# Allegro board GALVO_IF.brd
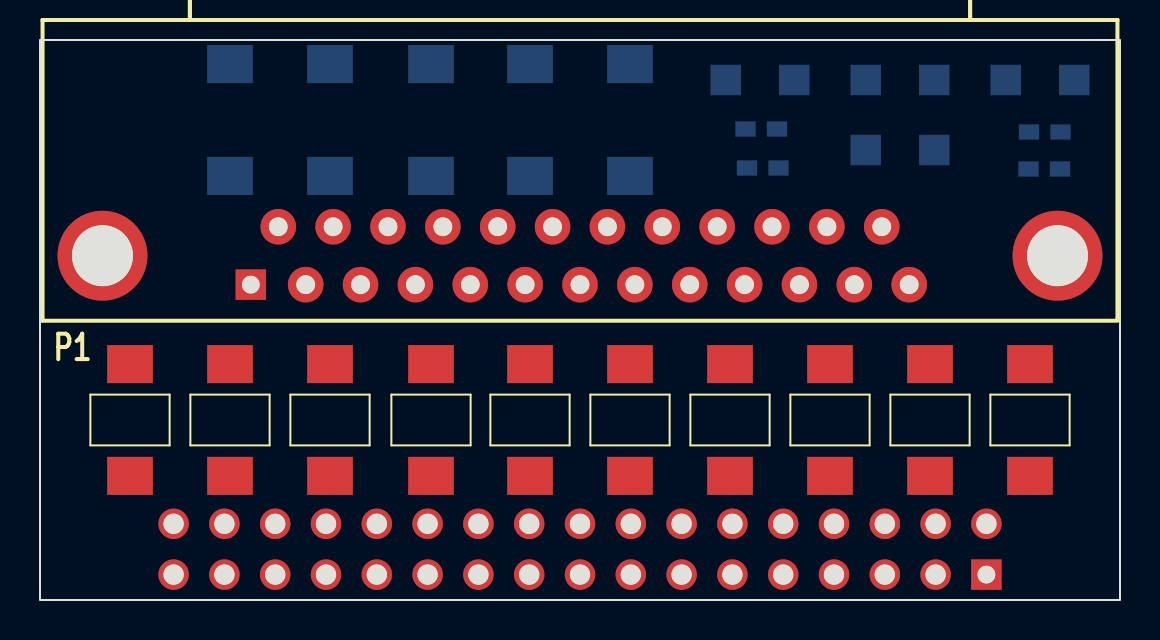
[diagram p0: board, top side]
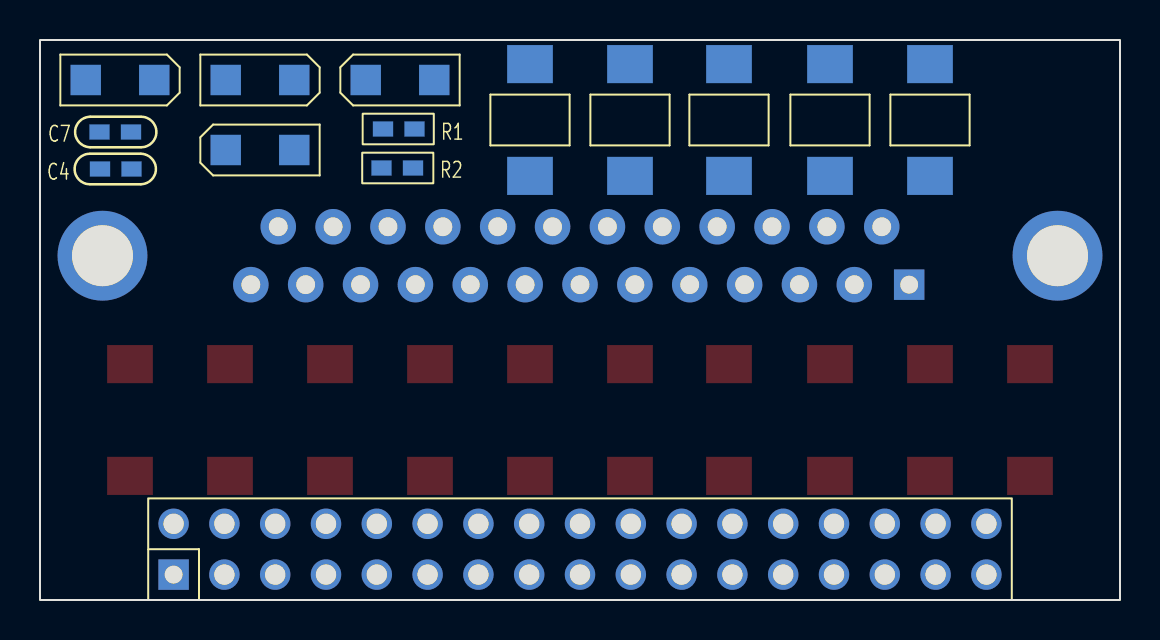
[diagram p1: board, bottom side, seen from below]

Outline 54 x 28 mm; copper layers: TOP, BOTTOM. Coordinates in mm from the lower left corner of the outline.
Outline path: rectangle 0,0 54,28

## Placement (name value [footprint] x y rotation side)
C1  102/2KV  [1206]  36 26 180 bottom
C3  22uF  [1206]  43 26 0 bottom
C4  0.1uF  [0603C]  51 21.55 180 bottom
C6  22uF  [1206]  50 26 0 bottom
C7  0.1uF  [0603C]  49.45 23.4 0 bottom
D1  SMBJ12CA  [DO-214AA]  9.5 24 270 bottom
D2  SMBJ12CA  [DO-214AA]  14.5 24 270 bottom
D3  SMBJ6.0CA  [DO-214AA]  9.5 9 270 top
D4  SMBJ6.0CA  [DO-214AA]  19.55 9 270 top
D5  SMBJ6.0CA  [DO-214AA]  4.5 9 270 top
D6  SMBJ6.0CA  [DO-214AA]  14.5 9 270 top
D7  SMBJ12CA  [DO-214AA]  19.55 24 270 bottom
D8  SMBJ12CA  [DO-214AA]  24.5 24 270 bottom
D9  SMBJ6.0CA  [DO-214AA]  29.5 9 270 top
D10  SMBJ6.0CA  [DO-214AA]  39.5 9 270 top
D11  SMBJ6.0CA  [DO-214AA]  24.5 9 270 top
D12  SMBJ6.0CA  [DO-214AA]  34.5 9 270 top
D13  SMBJ12CA  [DO-214AA]  29.5 24 270 bottom
D14  SMBJ6.0CA  [DO-214AA]  49.5 9 270 top
D15  SMBJ6.0CA  [DO-214AA]  44.5 9 270 top
J1  HEADER 17X2  [IDC34]  23.19 2.54 90 bottom
L1  FB  [1206]  43 22.5 180 bottom
P1  CONNECTOR DB25  [DB25HF]  27 29 180 top
R1  1M  [0603R]  36.85 23.55 180 bottom
R2  10  [0603R]  35.35 21.6 0 bottom

## Library data of the parts
C1 C3 C4 C6 C7 = C
D1-D15 = SMBJ6.0CA
J1 = HEADER 17X2
L1 = INDUCTOR
P1 = CONNECTOR DB25
R1 R2 = R

## Footprints (pads in the part's own frame, mm; a bottom-side part is the same pattern mirrored in y, then rotated)
0603C
  rect 1.016x0.762 smd: 1(0,0) 2(1.575,0)
0603R
  rect 1.016x0.762 smd: 1(0,0) 2(1.575,0)
1206
  rect 1.524x1.524 smd: 1(-1.714,0) 2(1.714,0)
DB25HF
  round 4.496 hole 3.048: (-23.876,11.786) (23.876,11.786)
  rect 1.524x1.524 hole 0.889: 1(16.459,13.233)
  round 1.778 hole 0.94: 2(13.716,13.233) 3(10.973,13.233) 4(8.23,13.233) 5(5.486,13.233) 6(2.743,13.233) 7(0,13.233) 8(-2.743,13.233) 9(-5.486,13.233) 10(-8.23,13.233) 11(-10.973,13.233) 12(-13.716,13.233) 13(-16.459,13.233) 14(15.088,10.338) 15(12.344,10.338) 16(9.601,10.338) 17(6.858,10.338) 18(4.115,10.338) 19(1.372,10.338) 20(-1.372,10.338) 21(-4.115,10.338) 22(-6.858,10.338) 23(-9.601,10.338) 24(-12.344,10.338) 25(-15.088,10.338)
DO-214AA
  rect 1.905x2.286 smd: 1(-2.794,0) 2(2.794,0)
IDC34
  rect 1.524x1.524 hole 0.889: 1(-1.27,24.13)
  round 1.524 hole 1.016: 2(1.27,24.13) 3(-1.27,21.59) 4(1.27,21.59) 5(-1.27,19.05) 6(1.27,19.05) 7(-1.27,16.51) 8(1.27,16.51) 9(-1.27,13.97) 10(1.27,13.97) 11(-1.27,11.43) 12(1.27,11.43) 13(-1.27,8.89) 14(1.27,8.89) 15(-1.27,6.35) 16(1.27,6.35) 17(-1.27,3.81) 18(1.27,3.81) 19(-1.27,1.27) 20(1.27,1.27) 21(-1.27,-1.27) 22(1.27,-1.27) 23(-1.27,-3.81) 24(1.27,-3.81) 25(-1.27,-6.35) 26(1.27,-6.35) 27(-1.27,-8.89) 28(1.27,-8.89) 29(-1.27,-11.43) 30(1.27,-11.43) 31(-1.27,-13.97) 32(1.27,-13.97) 33(-1.27,-16.51) 34(1.27,-16.51)

## Nets
GND: C3.2 C4.2 C6.1 C7.1 J1.9 J1.10 J1.11 J1.12 J1.13 J1.14 J1.15 J1.16 L1.1 P1.11 P1.23 P1.24
GND_EARTH: C1.1 R1.1
VDDNP: C6.2 C7.2 J1.17 J1.18 J1.19 J1.20 J1.21 J1.22 J1.23 J1.24 P1.12 P1.13 P1.25
VDDP: C3.1 C4.1 J1.1 J1.2 J1.3 J1.4 J1.5 J1.6 J1.7 J1.8 P1.9 P1.10 P1.22
REFIO: P1.20 R2.1
XY_CLK+: D1.2 D5.1 J1.33 P1.14
XY_CLK-: D1.1 D3.1 J1.34 P1.1
XY_GND: C1.2 D3.2 D4.2 D5.2 D6.2 D9.2 D10.2 D11.2 D12.2 D14.2 D15.2 L1.2 R1.2 R2.2
XY_STATUS+: D13.2 D15.1 J1.25 P1.19
XY_STATUS-: D13.1 D14.1 J1.26 P1.6
XY_SYNC+: D2.2 D6.1 J1.31 P1.15
XY_SYNC-: D2.1 D4.1 J1.32 P1.2
XY_X+: D7.2 D11.1 J1.29 P1.16
XY_X-: D7.1 D9.1 J1.30 P1.3
XY_Y+: D8.2 D12.1 J1.27 P1.17
XY_Y-: D8.1 D10.1 J1.28 P1.4

Pads without a net: P1 5 7 8 18 21
